# EAGLE board 3x4 Header Sparse Fab (EAGLE 6.6.0)

Size 101.6 x 76.2 mm. Coordinates in mm from the lower left corner, seen from the top.
Copper layers (1*16): Top 0.035mm / dielectric 1.5mm / Bottom 0.035mm
Design rules "default": minimum track width 10mil, minimum drill 24mil, track to track 8mil, track to pad 8mil, pad to pad 8mil, via to via 8mil, smd to smd 8mil, copper to edge 40mil, drill to drill 8mil, minimum pad ring 10mil, minimum via ring 8mil, stop-mask expansion 4mil, vias tented up to drill 0mil, thermal gap 10mil

## Footprints (pad centres in the part's own frame; a part is rotated, then mirrored left to right if it is on the bottom)
3X4_HEADER_SPARSE_RAW = drill 0.3 pad 0.8: + 12.7,73.66; +@1 38.1,73.66; +@2 63.5,73.66; +@3 19.05,38.1; +@4 44.45,38.1; +@5 69.85,38.1; +@6 88.9,73.66; +@7 25.4,2.54; +@8 50.8,2.54; +@9 76.2,2.54; - 25.4,73.66; -@1 50.8,73.66; -@2 76.2,73.66; -@3 82.55,38.1; -@4 57.15,38.1; -@5 31.75,38.1; -@6 12.7,2.54; -@7 38.1,2.54; -@8 63.5,2.54; -@9 88.9,2.54; V1 19.05,64.77; V2 31.75,64.77; V3 44.45,64.77; V4 57.15,64.77; V5 69.85,64.77; V6 82.55,64.77; V7 19.05,55.88; V8 31.75,55.88; V9 44.45,55.88; V10 57.15,55.88; V11 69.85,55.88; V12 82.55,55.88; V13 19.05,46.99; V14 31.75,46.99; V15 44.45,46.99; V16 57.15,46.99; V17 69.85,46.99; V18 82.55,46.99; V19 19.05,29.21; V20 31.75,29.21; V21 44.45,29.21; V22 57.15,29.21; V23 69.85,29.21; V24 82.55,29.21; V25 19.05,20.32; V26 31.75,20.32; V27 44.45,20.32; V28 57.15,20.32; V29 69.85,20.32; V30 82.55,20.32; V31 19.05,11.43; V32 31.75,11.43; V33 44.45,11.43; V34 57.15,11.43; V35 69.85,11.43; V36 82.55,11.43 | smd 1.27 x 0.635: P1 6.985,69.85; P2 6.985,67.31; P3 6.985,64.77; P4 6.985,62.23; P5 6.985,59.69; P6 6.985,57.15; P7 6.985,54.61; P8 6.985,52.07; P9 6.985,49.53; P10 6.985,46.99; P11 6.985,44.45; P12 6.985,41.91; P13 6.985,39.37; P14 6.985,36.83; P15 6.985,34.29; P16 6.985,31.75; P17 6.985,29.21; P18 6.985,26.67; P19 6.985,24.13; P20 6.985,21.59; P21 6.985,19.05; P22 6.985,16.51; P23 6.985,13.97; P24 6.985,11.43; P25 6.985,8.89; P26 6.985,6.35; P27 94.615,69.85; P28 94.615,67.31; P29 94.615,64.77; P30 94.615,62.23; P31 94.615,59.69; P32 94.615,57.15; P33 94.615,54.61; P34 94.615,52.07; P35 94.615,49.53; P36 94.615,46.99; P37 94.615,44.45; P38 94.615,41.91; P39 94.615,39.37; P40 94.615,36.83; P41 94.615,34.29; P42 94.615,31.75; P43 94.615,29.21; P44 94.615,26.67; P45 94.615,24.13; P46 94.615,21.59; P47 94.615,19.05; P48 94.615,16.51; P49 94.615,13.97; P50 94.615,11.43; P51 94.615,8.89; P52 94.615,6.35 | smd 1.27 x 0.635 bottom: P1@1 6.985,69.85; P2@1 6.985,67.31; P3@1 6.985,64.77; P4@1 6.985,62.23; P5@1 6.985,59.69; P6@1 6.985,57.15; P7@1 6.985,54.61; P8@1 6.985,52.07; P9@1 6.985,49.53; P10@1 6.985,46.99; P11@1 6.985,44.45; P12@1 6.985,41.91; P13@1 6.985,39.37; P14@1 6.985,36.83; P15@1 6.985,34.29; P16@1 6.985,31.75; P17@1 6.985,29.21; P18@1 6.985,26.67; P19@1 6.985,24.13; P20@1 6.985,21.59; P21@1 6.985,19.05; P22@1 6.985,16.51; P23@1 6.985,13.97; P24@1 6.985,11.43; P25@1 6.985,8.89; P26@1 6.985,6.35; P27@1 94.615,69.85; P28@1 94.615,67.31; P29@1 94.615,64.77; P30@1 94.615,62.23; P31@1 94.615,59.69; P32@1 94.615,57.15; P33@1 94.615,54.61; P34@1 94.615,52.07; P35@1 94.615,49.53; P36@1 94.615,46.99; P37@1 94.615,44.45; P38@1 94.615,41.91; P39@1 94.615,39.37; P40@1 94.615,36.83; P41@1 94.615,34.29; P42@1 94.615,31.75; P43@1 94.615,29.21; P44@1 94.615,26.67; P45@1 94.615,24.13; P46@1 94.615,21.59; P47@1 94.615,19.05; P48@1 94.615,16.51; P49@1 94.615,13.97; P50@1 94.615,11.43; P51@1 94.615,8.89; P52@1 94.615,6.35 | drill 1.016 long: P1@2 3.81,69.85; P2@2 3.81,67.31; P3@2 3.81,64.77; P4@2 3.81,62.23; P5@2 3.81,59.69; P6@2 3.81,57.15; P7@2 3.81,54.61; P8@2 3.81,52.07; P9@2 3.81,49.53; P10@2 3.81,46.99; P11@2 3.81,44.45; P12@2 3.81,41.91; P13@2 3.81,39.37; P14@2 3.81,36.83; P15@2 3.81,34.29; P16@2 3.81,31.75; P17@2 3.81,29.21; P18@2 3.81,26.67; P19@2 3.81,24.13; P20@2 3.81,21.59; P21@2 3.81,19.05; P22@2 3.81,16.51; P23@2 3.81,13.97; P24@2 3.81,11.43; P25@2 3.81,8.89; P26@2 3.81,6.35; P27@2 97.79,69.85; P28@2 97.79,67.31; P29@2 97.79,64.77; P30@2 97.79,62.23; P31@2 97.79,59.69; P32@2 97.79,57.15; P33@2 97.79,54.61; P34@2 97.79,52.07; P35@2 97.79,49.53; P36@2 97.79,46.99; P37@2 97.79,44.45; P38@2 97.79,41.91; P39@2 97.79,39.37; P40@2 97.79,36.83; P41@2 97.79,34.29; P42@2 97.79,31.75; P43@2 97.79,29.21; P44@2 97.79,26.67; P45@2 97.79,24.13; P46@2 97.79,21.59; P47@2 97.79,19.05; P48@2 97.79,16.51; P49@2 97.79,13.97; P50@2 97.79,11.43; P51@2 97.79,8.89; P52@2 97.79,6.35

## Placement (x,y rotation side)
E$1  [3X4_HEADER_SPARSE_RAW]  0,0 0 top

## Library data of the parts
E$1 = voltera_EAGLE_community_lib